# Altium PCB Solar_plant.PcbDoc
Units mil, origin at the board's own origin, x right, y up, seen from the top; angles counter-clockwise.
Board outline 2590 x 1165 mil, 2 copper layers (Top Layer, Bottom Layer); 10 components, 7 nets, 23 pads, 0 vias.
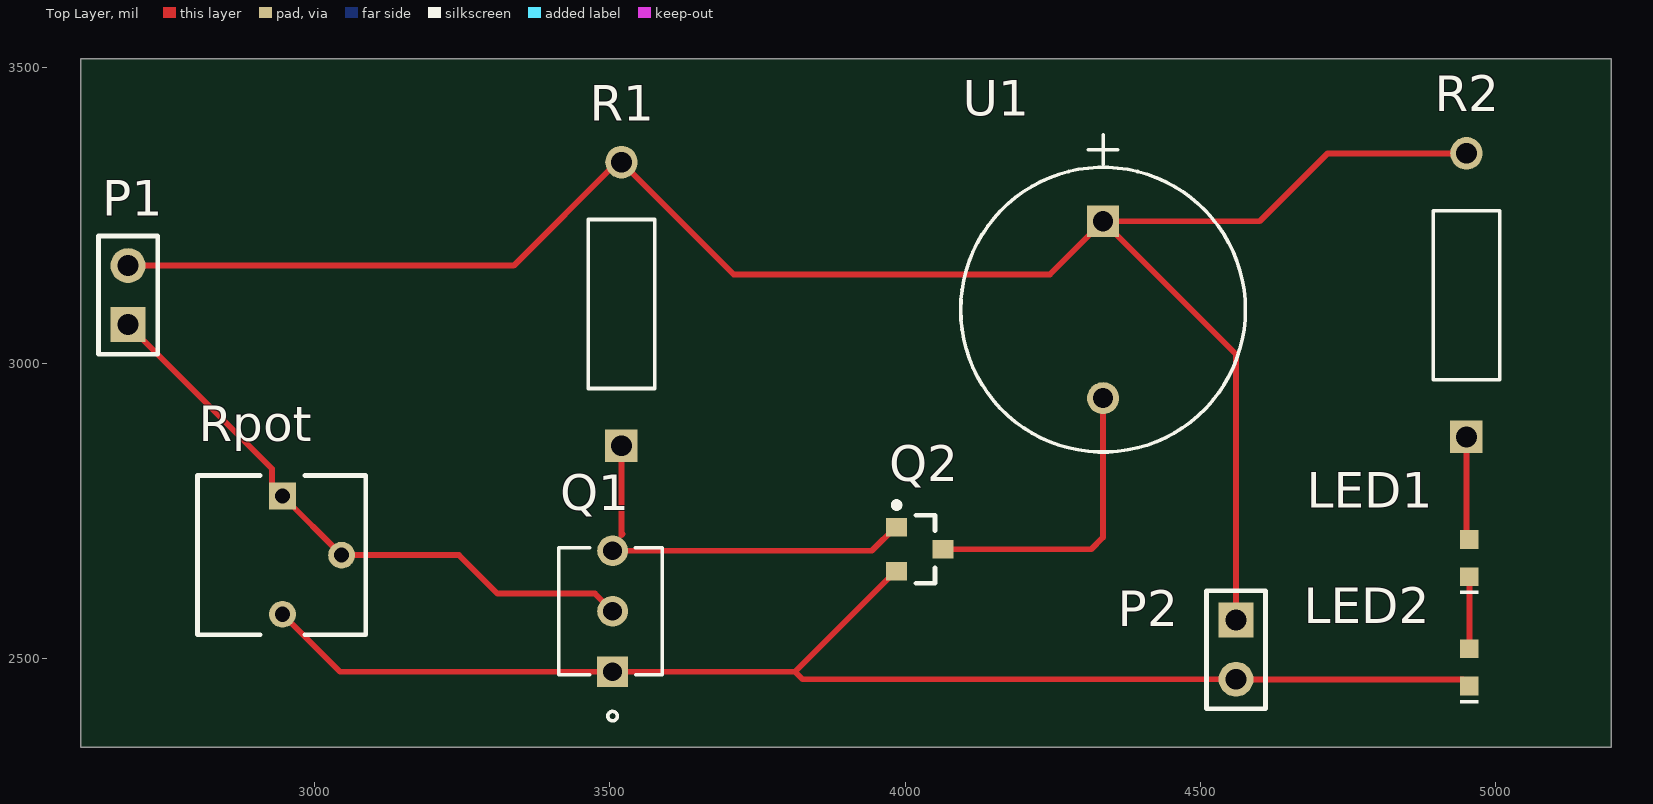
[diagram p0: Top Layer view]
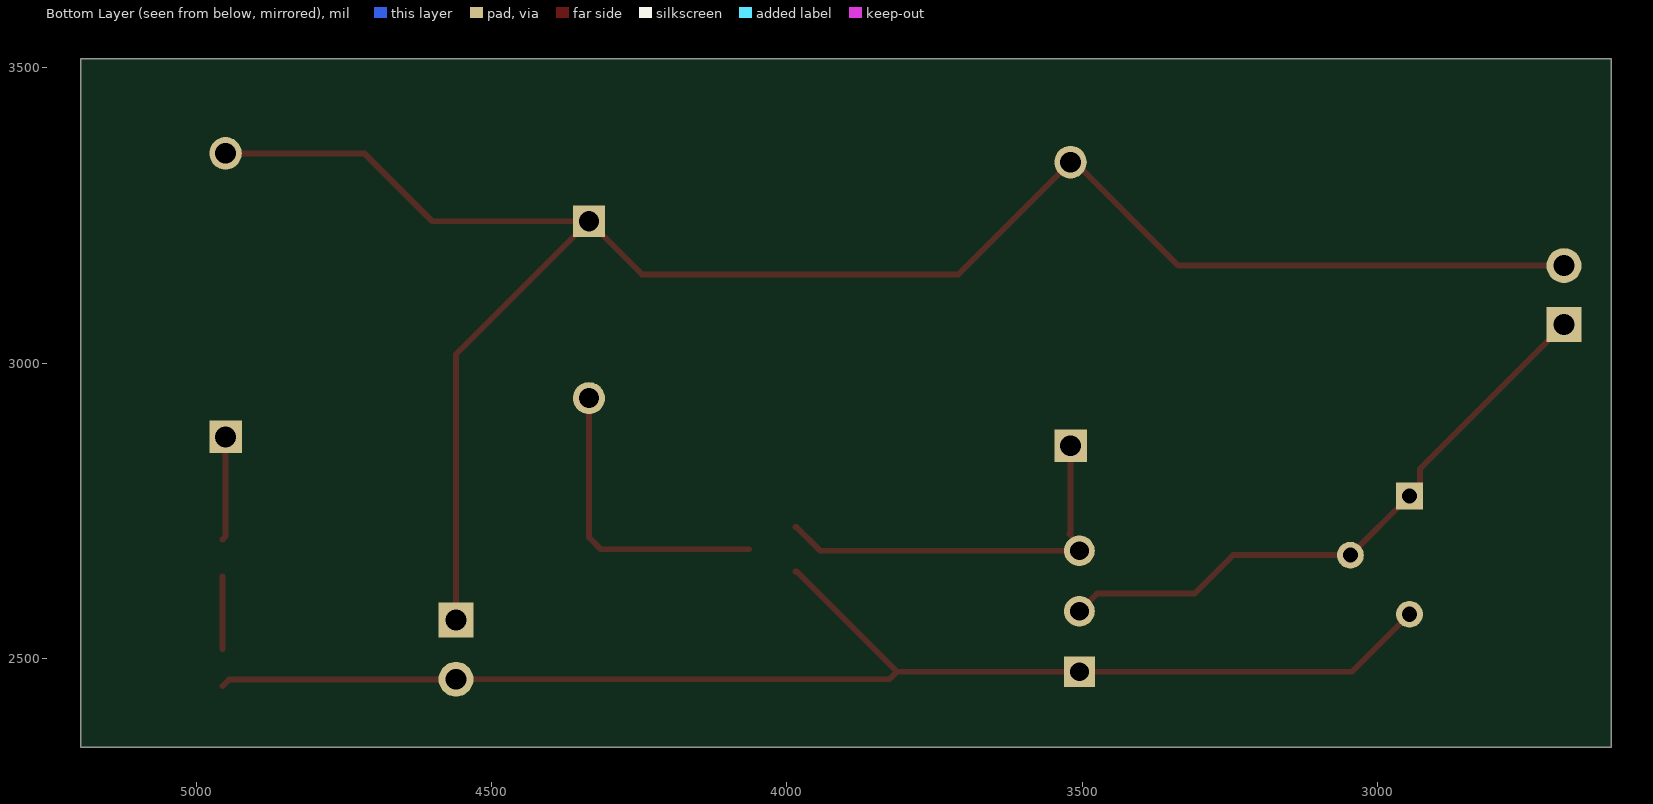
[diagram p1: Bottom Layer view, seen from below]
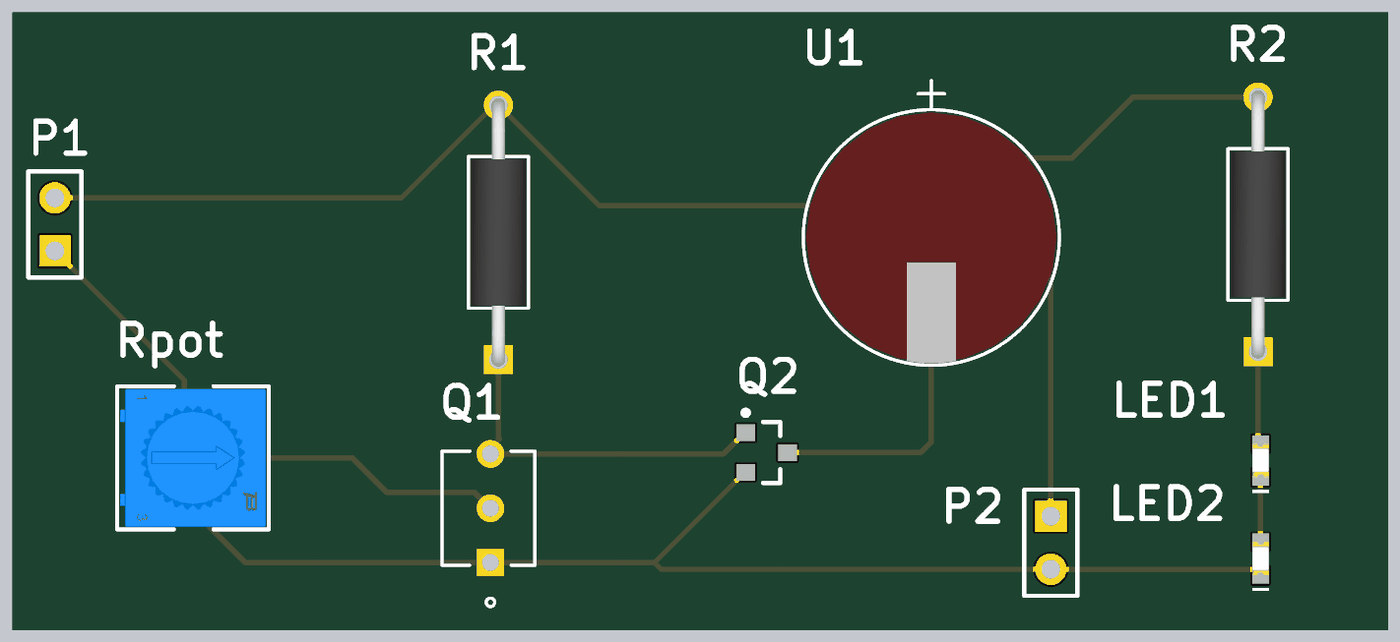
[diagram p2: 3D render of the assembled board from above, using the file's embedded part models]

## Layer stack, top to bottom
Top Solder: solder mask 0.4, Solder Resist, Dk 3.5
Top Layer: signal copper 1.4
Dielectric 1: dielectric 12.6, FR-4, Dk 4.8
Bottom Layer: signal copper 1.4
Bottom Solder: solder mask 0.4, Solder Resist, Dk 3.5

## Board outline
2605,2350 2605,3515 5195,3515 5195,2350

## Design rules (kind name [scope] priority, off if disabled: settings)
Clearance [All] p1: gap=10 ignorepadtopadclearanceinfootprint=FALSE except(0: Arc-Hole Track-Hole SMDPad-Hole THPad-Hole Via-Hole Fill-Hole Poly-Hole Region-Hole Text-Hole)
PolygonConnect [All] p1: connectstyle=Relief reliefconductorwidth=10 reliefentries=4 polygonreliefangle="90 Angle" airgapwidth=10
RoutingVias [All] p1: holewidth=28 width=50 viastyle="Through Hole" minholewidth=28 minwidth=50 maxholewidth=28 maxwidth=50
SilkToSolderMaskClearance [IsPad] p1: minsilkscreentomaskgap=0 clearancetoexposedcopper=TRUE
SolderMaskExpansion [All] p1: expansion=4 istentingtop=FALSE
Width [All] p1: maxlimit=10 minlimit=10 preferedwidth=10
29 further rules are at their usual default settings.

## Components (designator, comment, footprint, x,y, rotation, side; value= is the part's Value field where it differs from the comment)
LED1 "150060RS75000" WL-SMCW_0603_150060xx75000 4955,2670 r90 top
LED2 "150060RS75000" WL-SMCW_0603_150060xx75000 4955,2485 r90 top
P1 "moisture probe" HDR1X2 2685,3065 r90 top
P2 "Solar cell" HDR1X2 4560,2565 r270 top
Q1 "2N3904TAR" TO-92-3_135AR_ONS 3505,2477.64 r90 top
Q2 "MMBT2222LT1G" ONSC-SOT-23-3-318-08_V 4025,2685 r0 top
R1 "RNF14FTD100R" STA_RNF14_STP 3520,2860 r90 top
R2 "RNF14FTD100R" STA_RNF14_STP 4950,2875 r90 top
Rpot "3362P-1-503TLF" FP-3362P-1-503TLF-MFG 2945,2675 r270 top
U1 "AI-1223-TWT-5V-5-R" AI-1223-TWT-5V-5-R_PUI 4335,3240 r270 top

## Footprints (in the part's own frame and the unit in brackets; to place one, negate y for a bottom-side part, rotate by r counter-clockwise, add the part's x,y. Pads: shape width x height; smd on the part's side, far side on the other; paste and mask are expansions set on the pad)
AI-1223-TWT-5V-5-R_PUI [mil]
  rect 54x54 / inner round 60 / far side rect 54x54 hole 34 paste-99999 mask+0: 1(0,0)
  round 54 / inner round 60 / far side round 54 hole 34 paste-99999 mask+0: 2(299.21,0)
  silkscreen extent -146,-241 390,241, body extent -86,-236 387,236, height 375
FP-3362P-1-503TLF-MFG [mm]
  rect 1.15x1.15 hole 0.65 paste-2539.97 mask+0: 1(-2.54,0.035)
  round 1.15 hole 0.65 paste-2539.97 mask+0: 2(0,2.575) 3(2.54,0.035)
  silkscreen extent -3.42,-3.62 3.42,3.62, body extent -3.52,-3.72 3.52,3.72, height 0.25
HDR1X2 [mm] "Connector; Header; 2 Position"
  rect 1.5x1.5 hole 0.9: 1(0,0)
  round 1.5 hole 0.9: 2(2.54,0)
  silkscreen extent -1.27,-1.27 3.81,1.27
ONSC-SOT-23-3-318-08_V [mm] "SOT23, 3-Leads, Body 2.92x1.3mm, Pitch 0.95mm"
  rect 0.9x0.8 smd: 1(-1,0.95) 2(-1,-0.95) 3(1,0)
  silkscreen extent -1.12,-1.46 0.65,2.02, body extent -0.65,-1.46 0.65,1.46, height 1.11
STA_RNF14_STP [mil]
  rect 55x55 / inner round 60 / far side rect 55x55 hole 35 paste-99999 mask+0: 1(0,0)
  round 55 / inner round 60 / far side round 55 hole 35 paste-99999 mask+0: 2(480,0)
  silkscreen extent 97,-56 383,57, body extent -12,-51 493,51, height 103
TO-92-3_135AR_ONS [mil]
  rect 52x52 / inner round 60 / far side rect 52x52 hole 32 paste-99999 mask+0: 1(0,0)
  round 52 / inner round 60 / far side round 52 hole 32 paste-99999 mask+0: 2(102.36,0) 3(204.72,0)
  silkscreen extent -83,-84 210,91
WL-SMCW_0603_150060xx75000 [mm] "SMD Mono-color Chip LED, body 1.6x0.8mm"
  rect 0.8x0.8 smd: 1(-0.8,0) 2(0.8,0)
  silkscreen extent -1.55,-0.4 -1.4,0.4, body extent -0.8,-0.4 0.8,0.4, height 0.7

## Part data
LED1 LED2: library part CMP-1426-00001-3, Case Code (Imperial)=0603, Case Code (Metric)=1608, Color=Red, Forward Current=100mA, Forward Voltage=2V, Max Junction Temperature (Tj)=95°C, Max Operating Temperature=85°C, Max Reverse Voltage (DC)=5V, Min Operating Temperature=-40°C, Power Dissipation=72mW, Test Current=20mA, Case/Package=0603, Dominant Wavelength=625nm, Height=700µm, Length=1.6mm, Lens Style="Clear, Rectangular", Luminous Intensity=250mcd, Mount="Surface Mount", NexarPartId=29717776, Packaging="Tape and Reel", Peak Wavelength=630nm, REACH SVHC=Unknown, Reverse Voltage=5V, RoHS=Compliant, Viewing Angle=140°, Wavelength=625nm, Width=800µm
P1 P2: library part "Header 2", "Header, 2-Pin", LatestRevisionDate=17-Jul-2002, LatestRevisionNote="Re-released for DXP Platform.", Publisher="Altium Limited"
Q1: "No Description Available", Mfr_Name=onsemi, Copyright="Copyright (C) 2024 Ultra Librarian. All rights reserved.", Manufacturer_Part_Number=2N3904TAR, RefDes=RefDes, Type=DEV
Q2: library part CMP-0722-00001-2, "General Purpose Transistor, NPN Silicon, 3-Pin SOT-23, Pb-Free, Tape and Reel", Manufacturer="On Semiconductor", ComponentLink1Description="Manufacturer URL", ComponentLink1URL=http://www.onsemi.com/, ComponentLink2Description=Datasheet, ComponentLink2URL=http://www.onsemi.cn/pub_link/Collateral/MMBT2222LT1-D.PDF, ComponentLink3Description="Package Specification", ComponentLink3URL=http://www.onsemi.cn/pub_link/Collateral/318-08.PDF, DatasheetVersion="Rev. 10", fT Min (MHz)=250, IC Continuous (A)=0.6, Mounting Technology="Surface Mount", PackageDescription="3-Pin Small Outline Transistor, Body 2.92 x 1.3 mm, Pitch 0.95 mm", PackageReference=SOT-23-3-318-08, PackageVersion="Rev. AP, 11/2009", Packing="Tape and Reel", PartNumber=MMBT2222LT1G, Polarity=NPN, RoHS=TRUE
R1 R2: "No Description Available", Mfr_Name="Stackpole International", Copyright="Copyright (C) 2024 Ultra Librarian. All rights reserved.", Manufacturer_Part_Number=RNF14FTD100R, RefDes=RefDes, Type=DEV
Rpot: library part CMP-07234-000028-1, "TRIMMER 50K OHM 0.5W PC PIN TOP", Max Operating Temperature=125°C, Max Power Dissipation=500mW, Min Operating Temperature=-55°C, Package Quantity=50, Resistance=50kR, Resistance Tolerance=10%, Resistor Type=Cermet, Temperature Coefficient=100ppm/°C, Voltage Rating (DC)=300V, Depth=7.04mm, Height=0.185inch, Lead Free="Lead Free", Length=6.6mm, Military Standard=Not, Mount="Through Hole", Number of Turns=1, Packaging=Rail/Tube, Power Rating=500mW, Radiation Hardening=No, REACH SVHC="No SVHC", RoHS Compliant=Yes, Series="Trimpot® 3362 - Sealed", Technology=CERMET, Termination=Pin, Tolerance=10%, Weight=0.02oz, Width=4.7mm
U1: "No Description Available", Mfr_Name="PUI Audio", Copyright="Copyright (C) 2024 Ultra Librarian. All rights reserved.", Manufacturer_Part_Number=AI-1223-TWT-5V-5-R, RefDes=RefDes, Type=DEV

## Nets (pads, with @x,y where several pads share a name; then routed paths per layer and width w, separated by ;. In a path a pad name is that pad's centre, name@x,y a point inside that pad or via, vN(x,y) a via of type N, cw(c..) or ccw(c..) an arc to the next point about the centre after c; other vN are vias at no path point)
Ground: LED2.1 P2.2 Q1.1 Q2.2 Rpot.3 | length 2301.3
  Top Layer w10: Rpot.3 3043.74,2477.64 Q1.1 3813.7,2477.64 ; Q2.2 3983.66,2647.6 3813.7,2477.64 ; LED2.1 4944.25,2464.25 4560.75,2464.25 P2.2 3826.34,2465 3813.7,2477.64
NetLED1_1: LED1.1 LED2.2 | length 122
  Top Layer w10: LED2.2 LED1.1
NetLED1_2: LED1.2 R2.1 | length 175.6
  Top Layer w10: R2.1 4950,2706.5 LED1.2
NetP1_1: P1.1 Q1.2 Rpot.1 Rpot.2 | length 1037.7
  Top Layer w10: P1.1 2928.74,2821.26 2928.74,2792.64 Rpot.1 Rpot.2 3245,2675 3310,2610 3475,2610 Q1.2
NetQ1_3: Q1.3 Q2.1 R1.1 | length 651.2
  Top Layer w10: Q1.3 3943.62,2682.36 3983.66,2722.4 Q2.1 ; R1.1 3520,2708.73 3521.9,2710.63
NetQ2_3: Q2.3 U1.2 | length 514.7
  Top Layer w10: Q2.3 4315,2685 4335,2705 U1.2
VCC: P1.2 P2.1 R1.2 R2.2 U1.1 | length 3269.3
  Top Layer w10: P1.2 3337.5,3165 3512.5,3340 R1.2 3710,3150 4245,3150 U1.1 ; P2.1 4560,3015 U1.1 ; R2.2 4715,3355 4600,3240 U1.1